# Altium PCB DS162-1.0-B甲烷传感器.PcbDoc
Units mm, origin at the board's own origin, x right, y up, seen from the top; angles counter-clockwise.
Board outline 41 x 64 mm, 2 copper layers (Top Layer, Bottom Layer); 31 components, 32 nets, 108 pads, 86 vias.
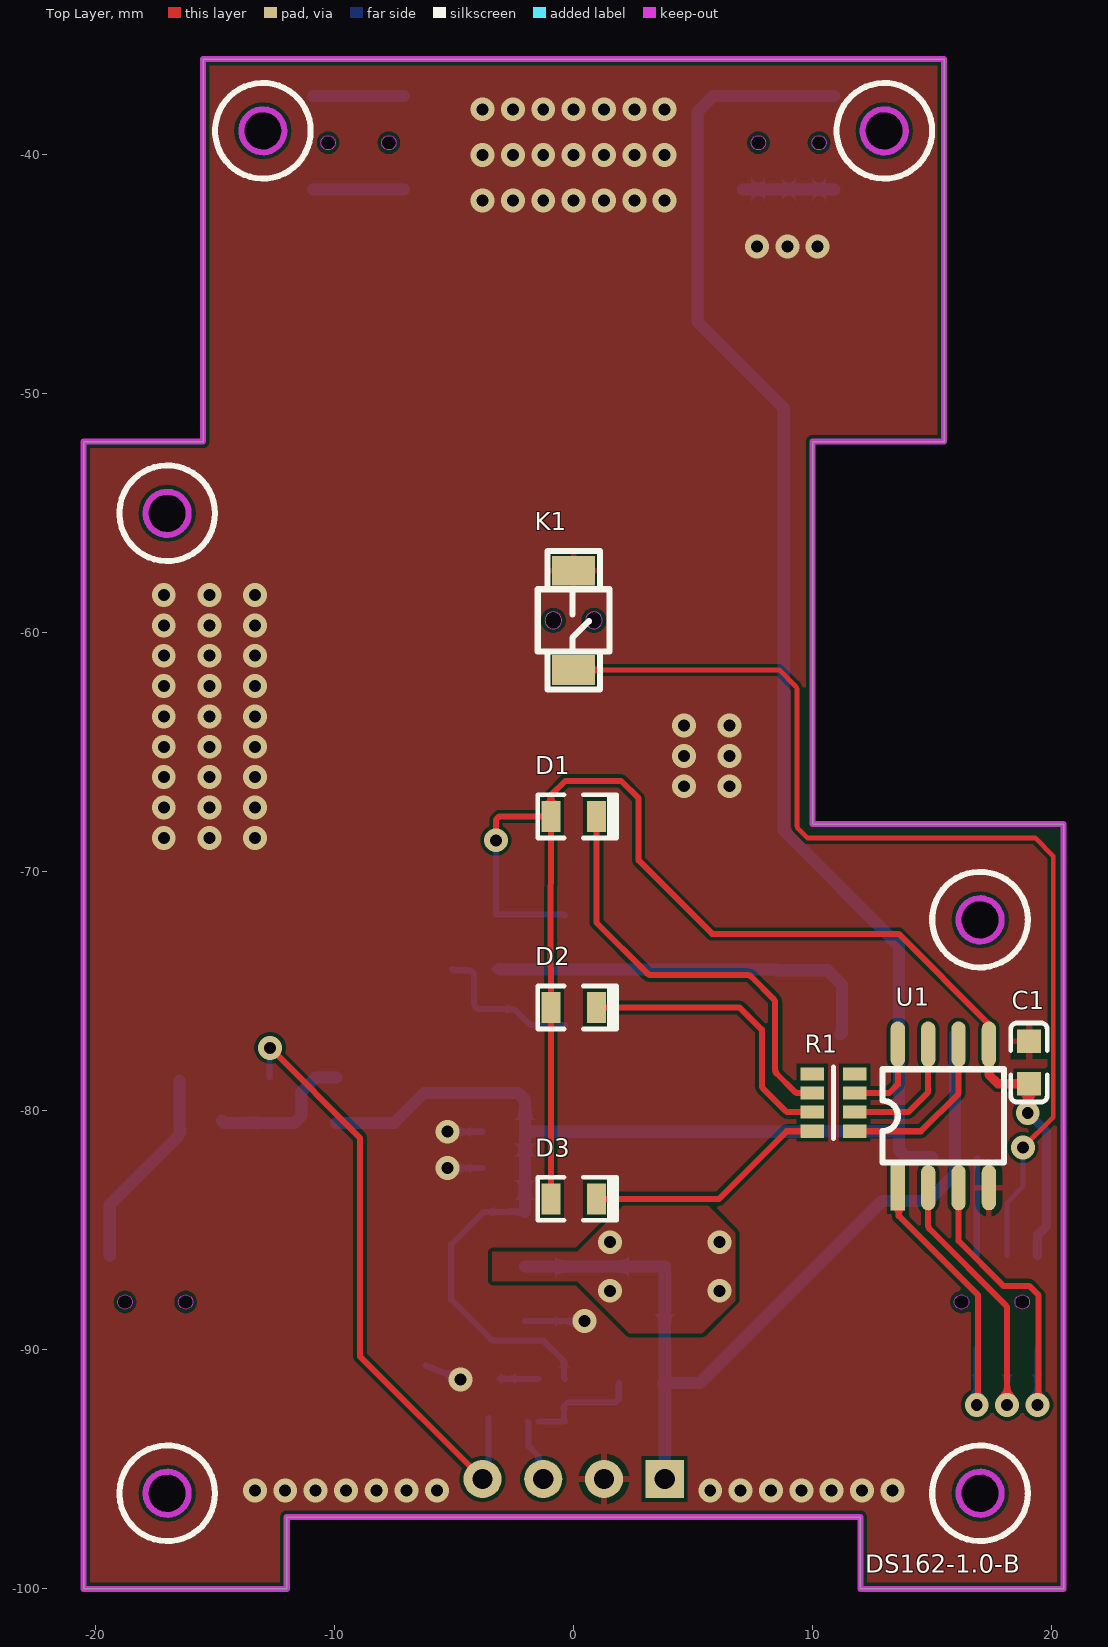
[diagram p0: Top Layer view]
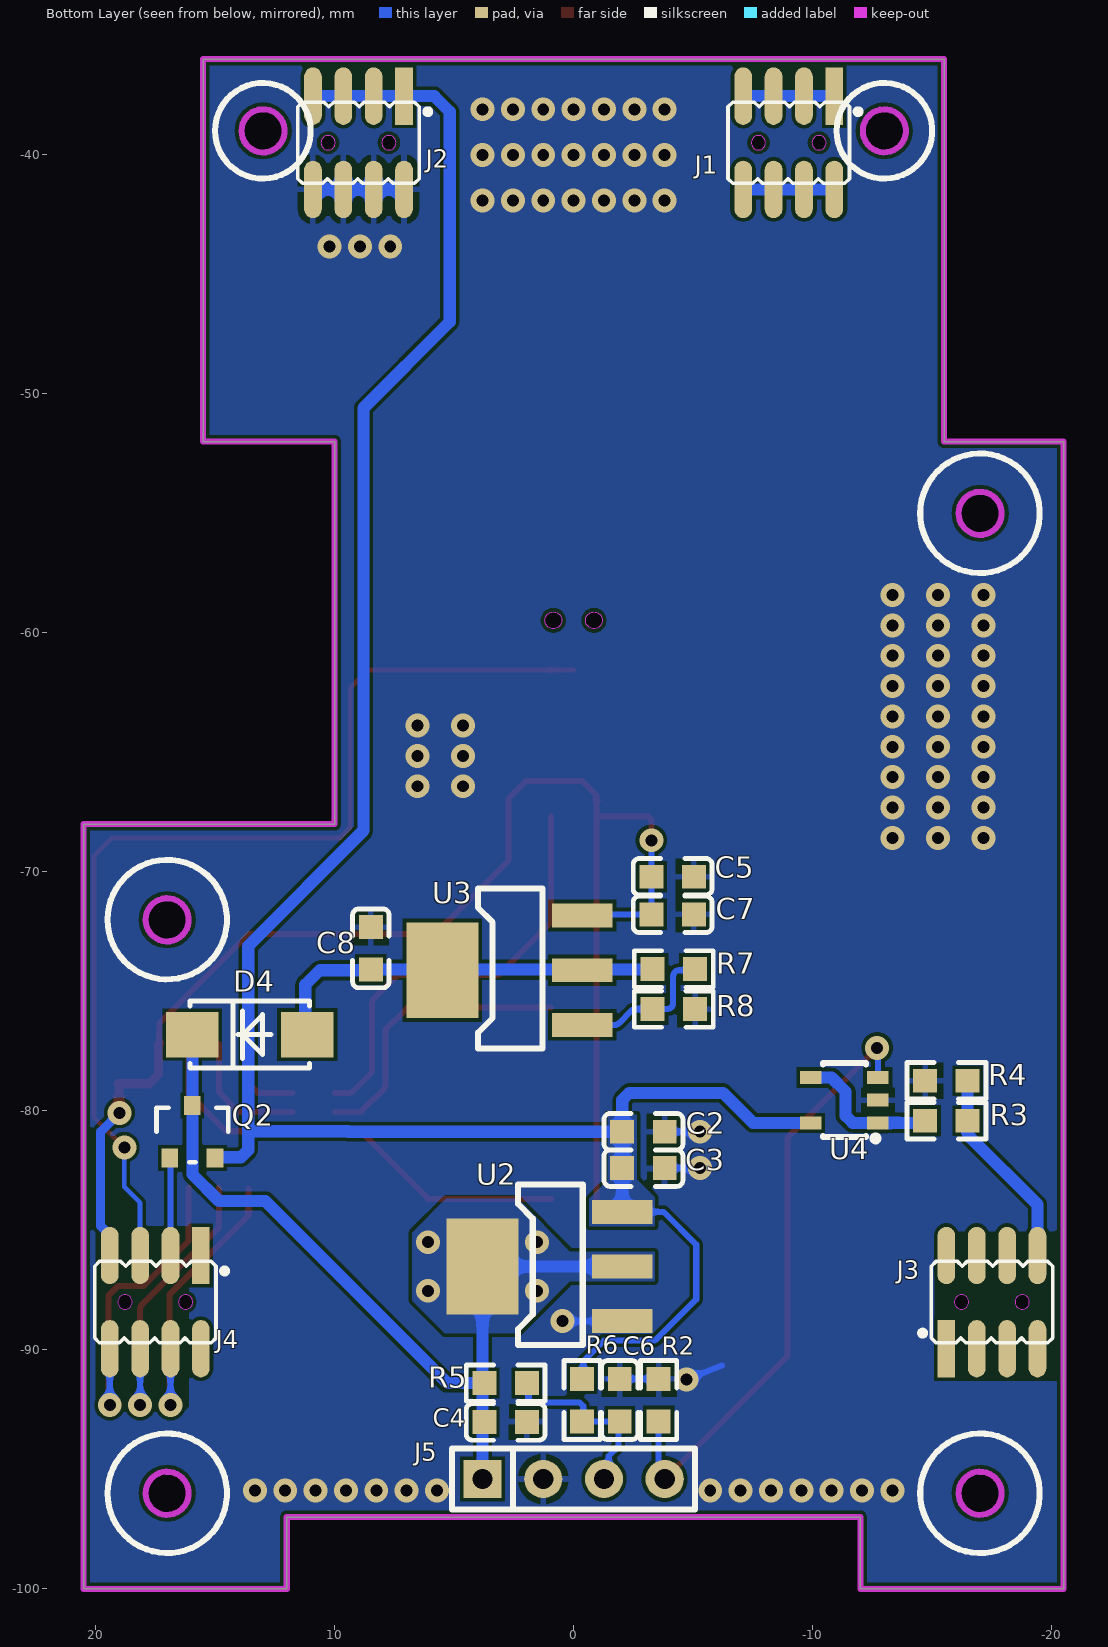
[diagram p1: Bottom Layer view, seen from below]

## Layer stack, top to bottom
Top Solder: solder mask 0.0102, Solder Resist, Dk 3.5
Top Layer: signal copper 0.0356
Dielectric 1: dielectric 0.32, FR-4, Dk 4.8
Bottom Layer: signal copper 0.0356
Bottom Solder: solder mask 0.0102, Solder Resist, Dk 3.5

## Board outline
-20.5,-100 -20.5,-52 -15.5,-52 -15.5,-36 15.5,-36 15.5,-52 10,-52 10,-68 20.5,-68 20.5,-100 12,-100 12,-97 -12,-97 -12,-100
cut-out: -17.9,-96 ccw(c-17,-96) -17,-96.9 ccw(c-17,-96) -16.1,-96 ccw(c-17,-96) -17,-95.1 ccw(c-17,-96)
cut-out: 16.1,-96 ccw(c17,-96) 17,-96.9 ccw(c17,-96) 17.9,-96 ccw(c17,-96) 17,-95.1 ccw(c17,-96)
cut-out: 16.1,-72 ccw(c17,-72) 17,-72.9 ccw(c17,-72) 17.9,-72 ccw(c17,-72) 17,-71.1 ccw(c17,-72)
cut-out: -17.9,-55 ccw(c-17,-55) -17,-55.9 ccw(c-17,-55) -16.1,-55 ccw(c-17,-55) -17,-54.1 ccw(c-17,-55)
cut-out: 12.1,-39 ccw(c13,-39) 13,-39.9 ccw(c13,-39) 13.9,-39 ccw(c13,-39) 13,-38.1 ccw(c13,-39)
cut-out: -13.9,-39 ccw(c-13,-39) -13,-39.9 ccw(c-13,-39) -12.1,-39 ccw(c-13,-39) -13,-38.1 ccw(c-13,-39)
cut-out: -17.9,-96 ccw(c-17,-96) -17,-96.9 ccw(c-17,-96) -16.1,-96 ccw(c-17,-96) -17,-95.1 ccw(c-17,-96)
cut-out: 16.1,-96 ccw(c17,-96) 17,-96.9 ccw(c17,-96) 17.9,-96 ccw(c17,-96) 17,-95.1 ccw(c17,-96)
cut-out: 16.1,-72 ccw(c17,-72) 17,-72.9 ccw(c17,-72) 17.9,-72 ccw(c17,-72) 17,-71.1 ccw(c17,-72)
cut-out: -17.9,-55 ccw(c-17,-55) -17,-55.9 ccw(c-17,-55) -16.1,-55 ccw(c-17,-55) -17,-54.1 ccw(c-17,-55)
cut-out: 12.1,-39 ccw(c13,-39) 13,-39.9 ccw(c13,-39) 13.9,-39 ccw(c13,-39) 13,-38.1 ccw(c13,-39)
cut-out: -13.9,-39 ccw(c-13,-39) -13,-39.9 ccw(c-13,-39) -12.1,-39 ccw(c-13,-39) -13,-38.1 ccw(c-13,-39)

## Design rules (kind name [scope] priority, off if disabled: settings)
Clearance [All] p1: gap=0.152 ignorepadtopadclearanceinfootprint=TRUE
PolygonConnect [All] p1: thpad.connectstyle=Relief thpad.reliefconductorwidth=0.254 thpad.reliefentries=4 thpad.polygonreliefangle="90 Angle" thpad.airgapwidth=0.254 smdpad.connectstyle=Relief smdpad.reliefconductorwidth=0.254 smdpad.reliefentries=4 smdpad.polygonreliefangle="90 Angle" smdpad.airgapwidth=0.254 via.connectstyle=Direct via.reliefconductorwidth=0.254 via.reliefentries=4 via.polygonreliefangle="90 Angle" via.airgapwidth=0.254
RoutingVias [All] p1: holewidth=0.406 width=0.813 viastyle="Through Hole" minholewidth=0.406 minwidth=0.813 maxholewidth=0.711 maxwidth=1.27
SolderMaskExpansion [All] p1: expansion=0.102 istentingtop=FALSE
Width [All] p1: maxlimit=0.508 minlimit=0.152 preferedwidth=0.254
30 further rules are at their usual default settings.

## Components (designator, comment, footprint, x,y, rotation, side; value= is the part's Value field where it differs from the comment)
C1 "SMDCAP00013" 0603CAP 19.05,-77.978 r270 top value=100nF
C2 "SMDCAP00015" 0603CAP -2.922,-80.874 r0 bottom value=1uF
C3 "SMDCAP00013" 0603CAP -2.922,-82.398 r0 bottom value=100nF
C4 "SMDCAP00015" 0603CAP 2.845,-93.015 r0 bottom value=1uF
C5 "SMDCAP00015" 0603CAP -4.141,-70.206 r0 bottom value=1uF
C6 "SMDCAP00013" 0603CAP -1.93,-92.1 r270 bottom value=100nF
C7 "SMDCAP00013" 0603CAP -4.141,-71.78 r0 bottom value=100nF
C8 "SMDCAP00015" 0603CAP 8.484,-73.203 r270 bottom value=1uF
D1 "SMDLED00010" LED_0805 0,-67.68 r0 top value=BLUE
D2 "SMDLED00003" LED_0805 0,-75.68 r0 top value=RED
D3 "Chip 翠绿LED 0805" LED_0805 0,-83.68 r0 top value=GREEN
D4 "SMDDIODE06003" SMA/DO-214AC 13.551,-76.81 r0 bottom value=SS12
J1 "X1321WVS-2x04J-C40D53" X1321WVS-2X04J-C40D53 -9,-39.5 r0 bottom locked value=2*4P
J2 "X1321WVS-2x04J-C40D53" X1321WVS-2X04J-C40D53 9,-39.5 r0 bottom locked value=2*4P
J3 "X1321WVS-2x04J-C40D53" X1321WVS-2X04J-C40D53 -17.5,-88 r180 bottom locked value=2*4P
J4 "X1321WVS-2x04J-C40D53" X1321WVS-2X04J-C40D53 17.5,-88 r0 bottom locked value=2*4P
J5 "SL000000042" SIP4 0,-95.402 r180 bottom value=MP-3B
K1 "TS-1185-B-A-A-A" KEY_TS-1185-x-A-A-A 0,-59.48 r270 top
Q2 "SMDPMOS00001" SOT23 15.951,-80.874 r180 bottom value=IRLML6402TRPBF
R1 "SMDRES05003" 0603RES_Pack4 10.871,-79.654 r180 top value=510R
R2 "SMDRES00047" 0603RES -3.556,-92.1 r270 bottom value=4.7K
R3 "SMDRES00056" 0603RES -15.596,-80.416 r0 bottom value=10K
R4 "SMDRES00056" 0603RES -15.596,-78.74 r0 bottom value=10K
R5 "Chip 0R 1/16W ±1％ 0603" 0603RES 2.845,-91.389 r0 bottom value=0R
R6 "Chip 0R 1/16W ±1％ 0603" 0603RES -0.356,-92.1 r270 bottom value=0R
R7 "SMDRES00027" 0603RES -4.192,-74.066 r0 bottom value=470R
R8 "SMDRES00038" 0603RES -4.192,-75.743 r180 bottom value=1.3K
U1 "SMDIC000018" SO-8 15.469,-80.21 r90 top value=ULN2001
U2 "SMDIC000020" SOT223 3.81,-86.512 r180 bottom value=AMS1117-2.5V
U3 "SMDIC000020" SOT223 5.486,-74.117 r180 bottom value=AMS1117-ADJ
U4 "AD8605" SOT23-5 -11.328,-79.553 r90 bottom

## Footprints (in the part's own frame and the unit in brackets; to place one, negate y for a bottom-side part, rotate by r counter-clockwise, add the part's x,y. Pads: shape width x height; smd on the part's side, far side on the other; paste and mask are expansions set on the pad)
0603CAP [mm]
  rect 1x1 smd: 1(-0.889,0) 2(0.89,0)
  silkscreen extent -1.65,-0.76 1.65,0.76, body extent -0.8,-0.4 0.8,0.4, height 0.3
0603RES [mm]
  rect 1x1 smd: 1(-0.889,0) 2(0.889,0)
  silkscreen extent -1.65,-0.76 1.65,0.76, body extent -0.8,-0.41 0.8,0.41, height 0.51
0603RES_Pack4 [mm]
  rect 1x0.55 smd mask+0.05: 1(-0.889,1.2) 2(-0.889,0.4) 3(-0.889,-0.4) 4(-0.889,-1.2) 5(0.889,-1.2) 6(0.889,-0.4) 7(0.889,0.4) 8(0.889,1.2)
  silkscreen extent 0,-1.5 0,1.5, body extent -0.8,-1.6 0.8,1.6, height 0.5
KEY_TS-1185-x-A-A-A [mm]
  rect 1.25x1.8 smd: 1(-2.075,0) 2(2.075,0)
  Keep-Out Layer board cut-out: 0.35,-0.85 0.323,-0.716 0.247,-0.603 0.134,-0.527 0,-0.5 0,-0.5 -0.134,-0.527 -0.247,-0.603 -0.323,-0.716 -0.35,-0.85 -0.35,-0.85 -0.323,-0.984 -0.247,-1.097 -0.134,-1.173 0,-1.2 0,-1.2 0.134,-1.173 0.247,-1.097 0.323,-0.984 0.35,-0.85
  Keep-Out Layer board cut-out: -0.35,0.85 -0.323,0.716 -0.247,0.603 -0.134,0.527 0,0.5 0,0.5 0.134,0.527 0.247,0.603 0.323,0.716 0.35,0.85 0.35,0.85 0.323,0.984 0.247,1.097 0.134,1.173 0,1.2 0,1.2 -0.134,1.173 -0.247,1.097 -0.323,0.984 -0.35,0.85
  silkscreen extent -2.9,-1.5 2.9,1.5, body extent -2.5,-1.5 2.5,1.5, height 2
LED_0805 [mm]
  rect 0.8x1.3 smd: 1(-0.95,0) 2(0.95,0)
  silkscreen extent -1.5,-0.9 1.8,0.9, body extent -1,-0.45 1.06,0.45, height 0.85
SIP4 [mm]
  rect 1.6x1.6 hole 0.843: 1(-3.81,0)
  round 1.6 hole 0.843: 2(-1.27,0) 3(1.27,0) 4(3.81,0)
  silkscreen extent -5.08,-1.27 5.08,1.27, body extent -5.08,-1.27 5.08,1.27, height 8.64
SMA/DO-214AC [mm]
  rect 2.2x1.9 smd: 1(-2.4,0) 2(2.4,0)
  silkscreen extent -2.5,-1.4 2.5,1.4, body extent -2.74,-1.4 2.74,1.4, height 2.28
SO-8 [mm]
  rect 1.9x0.6 smd: 1(-3,1.905)
  oval 1.9x0.6 smd: 2(-3,0.635) 3(-3,-0.635) 4(-3,-1.905) 5(3,-1.905) 6(3,-0.635) 7(3,0.635) 8(3,1.905)
  silkscreen extent -1.95,-2.54 1.95,2.54, body extent -3.07,-2.44 3.07,2.44, height 1.77
SOT23 [mm]
  rect 0.7x0.8 smd: 1(-0.95,-1.1) 2(0.95,-1.1) 3(0,1.1)
  silkscreen extent -1.5,-1.27 1.5,1, body extent -1.46,-1.17 1.46,1.17, height 1
SOT23-5 [mm] "SOT-23/SC-74A; 5 Leads; Body 3.1 x 3 mm, inc. leads (LxW max)"
  rect 0.55x0.9 smd: 1(-0.95,-1.4) 2(0,-1.4) 3(0.95,-1.4) 4(0.95,1.4) 5(-0.95,1.4)
  silkscreen extent -1.7,-1.4 1.55,0.9, body extent -1.45,-1.4 1.45,1.4, height 1.45
SOT223 [mm]
  rect 2.54x1 smd: 1(5.842,-2.286) 2(5.842,0) 3(5.842,2.286)
  rect 3x4 smd: 2(0,0)
  silkscreen extent 1.48,-3.28 4.19,3.42, body extent -0.4,-3.25 6.6,3.25, height 1.65
X1321WVS-2X04J-C40D53 [mm]
  rect 0.74x2.4 smd: 1(-1.905,-1.95)
  oval 0.74x2.4 smd: 2(-1.905,1.95) 3(-0.635,-1.95) 4(-0.635,1.95) 5(0.635,-1.95) 6(0.635,1.95) 7(1.905,-1.95) 8(1.905,1.95)
  Keep-Out Layer board cut-out: -1.57,0 -1.547,-0.115 -1.482,-0.212 -1.385,-0.277 -1.27,-0.3 -1.27,-0.3 -1.155,-0.277 -1.058,-0.212 -0.993,-0.115 -0.97,0 -0.97,0 -0.993,0.115 -1.058,0.212 -1.155,0.277 -1.27,0.3 -1.27,0.3 -1.385,0.277 -1.482,0.212 -1.547,0.115 -1.57,0
  Keep-Out Layer board cut-out: 1.57,0 1.547,0.115 1.482,0.212 1.385,0.277 1.27,0.3 1.27,0.3 1.155,0.277 1.058,0.212 0.993,0.115 0.97,0 0.97,0 0.993,-0.115 1.058,-0.212 1.155,-0.277 1.27,-0.3 1.27,-0.3 1.385,-0.277 1.482,-0.212 1.547,-0.115 1.57,0
  silkscreen extent -3,-1.7 2.54,1.7, body extent -2.54,-2.6 2.54,2.6, height 5.5

## Part data
C1 C3 C6 C7: library part "MLCC 100nF 50V ±10％ 0603", "贴片电容"
C2 C4 C5 C8: library part "MLCC 1uF 50V ±10％ 0603", "贴片电容"
D1: library part "Chip 蓝色LED 0805", "贴片LED"
D2: library part "Chip 红色LED 0805", "贴片LED"
D3: "贴片LED"
D4: library part "SS12 SMA/DO-214AC（1N5817）", "贴片肖特基二极管"
J1 J2 J3 J4: "双排针2x4P 立贴 1.27mm"
J5: library part "DIP4 单排直针 间距2.54mm 针长11mm 铜"
K1: "轻触开关"
Q2: library part "IRLML6402TRPBF SOT-23 IR", "贴片P-MOS管"
R1: library part "Chip R*4 510R 1/16W ±5％ 0603", "贴片排阻"
R2: library part "Chip 4.7K 1/16W ±1％ 0603", "贴片电阻"
R3 R4: library part "Chip 10K 1/16W ±1％ 0603", "贴片电阻"
R5 R6: "贴片电阻"
R7: library part "Chip 470R 1/16W ±1％ 0603", "贴片电阻"
R8: library part "Chip 1.3K 1/16W ±1％ 0603", "贴片电阻"
U1: library part "ULN2001 SOP-8", "电机驱动芯片"
U2 U3: library part "AMS1117-3.3V SOT-223", "稳压芯片"
U4: library part "AD8605 SOT23-5", "运放芯片"

## Via types
v1: diameter 1, hole 0.5, Top Layer to Bottom Layer, tented both sides, 86 vias

## Nets (pads, with @x,y where several pads share a name; then routed paths per layer and width w, separated by ;. In a path a pad name is that pad's centre, name@x,y a point inside that pad or via, vN(x,y) a via of type N, cw(c..) or ccw(c..) an arc to the next point about the centre after c; other vN are vias at no path point)
ADC0: J3.8 R3.1 R4.1 | length 8.5
  Bottom Layer w0.508: J3.8 -19.405,-83.922 -16.608,-81.125 ccw(c-16.967,-80.765) -16.459,-80.765 -16.485,-80.74 R3.1 R4.1
ADC1: J4.2
DAC_OUT: J3.6
Dis_blue_EN: J4.4 U1.1 | length 12.8
  Top Layer w0.254: U1.1@13.603,-83.25 13.603,-84.393 16.911,-87.701 16.911,-92.257 v1(16.865,-92.303)
  Bottom Layer w0.254: v1(16.865,-92.303) J4.4
Dis_green_EN: J4.8 U1.3 | length 13.5
  Top Layer w0.254: U1.3 16.104,-85.446 17.977,-87.319 19.052,-87.319 19.451,-87.718 19.451,-92.257 v1(19.405,-92.303)
  Bottom Layer w0.254: v1(19.405,-92.303) J4.8
Dis_red_EN: J4.6 U1.2 | length 12.8
  Top Layer w0.254: U1.2 14.834,-84.782 ccw(c15.088,-84.782) 14.908,-84.961 18.061,-88.114 cw(c17.881,-88.293) 18.135,-88.293 v1(18.135,-92.303)
  Bottom Layer w0.254: v1(18.135,-92.303) J4.6
GND: C1.1 C2.1 C3.1 C4.1 C5.1 C6.1 C7.1 C8.1 J2.2 J2.4 J2.6 J2.8 J5.2 K1.1 R2.1 R4.2 R8.2 U1.4 U2.1 U4.2 | length 12.5
  Bottom Layer w0.254: -6.198,-90.653 v1(-4.724,-91.237) ; v1(-5.283,-82.398) C3.1 ; v1(-5.283,-80.874) C2.1 ; R2.1@-3.099,-91.211 C6.1@-1.473,-91.211 ; U2.1 v1(0.457,-88.798)
  Bottom Layer w0.508: J2.2 J2.4 J2.6 J2.8
  other v1: -13.335,-95.885 -12.065,-95.885 -10.795,-95.885 -9.525,-95.885 -8.255,-95.885 -6.985,-95.885 -5.715,-95.885 5.715,-95.885 6.985,-95.885 8.255,-95.885 9.525,-95.885 10.795,-95.885 12.065,-95.885 13.335,-95.885 -17.145,-68.58 -15.24,-68.58 -13.335,-68.58 -17.145,-67.31 -15.24,-67.31 -13.335,-67.31 4.623,-66.421 6.528,-66.421 -17.145,-66.04 -15.24,-66.04 -13.335,-66.04 4.623,-65.151 6.528,-65.151 -17.145,-64.77 -15.24,-64.77 -13.335,-64.77 4.623,-63.881 6.528,-63.881 -17.145,-63.5 -15.24,-63.5 -13.335,-63.5 -17.145,-62.23 -15.24,-62.23 -13.335,-62.23 -17.145,-60.96 -15.24,-60.96 -13.335,-60.96 -17.145,-59.69 -15.24,-59.69 -13.335,-59.69 -17.145,-58.42 -15.24,-58.42 -13.335,-58.42 7.671,-43.84 8.941,-43.84 10.211,-43.84 -3.81,-41.91 -2.54,-41.91 -1.27,-41.91 0,-41.91 1.27,-41.91 2.54,-41.91 3.81,-41.91 -3.81,-40.005 -2.54,-40.005 -1.27,-40.005 0,-40.005 1.27,-40.005 2.54,-40.005 3.81,-40.005 -3.81,-38.1 -2.54,-38.1 -1.27,-38.1 0,-38.1 1.27,-38.1 2.54,-38.1 3.81,-38.1
I2C1_SCL: J4.1
I2C1_SDA: J4.3 Q2.1 | length 4.1
  Bottom Layer w0.254: J4.3 16.865,-82.01 Q2.1
KEY_HOME: J4.5 K1.2 | length 44.2
  Top Layer w0.2: K1.2 8.596,-61.555 9.289,-62.248 cw(c9.147,-62.389) 9.347,-62.389 9.347,-68.065 ccw(c9.547,-68.065) 9.406,-68.207 9.779,-68.58 19.304,-68.58 20.066,-69.342 20.066,-80.264 v1(18.796,-81.534)
  Bottom Layer w0.2: J4.5 18.135,-83.846 18.796,-83.185 v1(18.796,-81.534)
LED_blue: D1.2 R1.6 | length 18.1
  Top Layer w0.254: D1.2 0.95,-72.121 3.075,-74.246 ccw(c3.255,-74.066) 3.255,-74.32 7.261,-74.32 cw(c7.261,-74.574) 7.441,-74.395 8.358,-75.313 cw(c8.179,-75.492) 8.433,-75.492 8.433,-78.279 ccw(c8.687,-78.279) 8.507,-78.459 9.229,-79.181 ccw(c9.408,-79) 9.407,-79.254 R1.6
LED_green: D3.2 R1.8 | length 10.2
  Top Layer w0.254: D3.2 6.087,-83.68 8.913,-80.854 R1.8
LED_red: D2.2 R1.7 | length 12.2
  Top Layer w0.254: D2.2 6.948,-75.68 7.874,-76.606 7.874,-78.914 ccw(c8.128,-78.914) 7.948,-79.094 8.835,-79.981 ccw(c9.014,-79.8) 9.013,-80.054 R1.7
NetC6_2: C6.2 J5.3 R5.1 R6.2 | length 7.5
  Bottom Layer w0.254: C6.2 -1.88,-93.041 -1.88,-94.031 -1.47,-94.44 -1.47,-95.202 J5.3 ; C6.2@-1.473,-92.99 R6.2 ; R6.2 -0.406,-92.939 -0.406,-92.354 -0.254,-92.202 1.74,-92.202 1.889,-92.053 1.889,-91.406 R5.1@1.905,-91.389
NetR1_1: R1.1 U1.6 | length 7.1
  Top Layer w0.254: R1.1 14.529,-80.854 16.104,-79.28 U1.6
NetR1_2: R1.2 U1.7 | length 5.4
  Top Layer w0.254: R1.2 14.002,-80.054 14.834,-79.223 U1.7
NetR1_3: R1.3 U1.8 | length 3.6
  Top Layer w0.254: R1.3 13.202,-79.254 13.564,-78.892 U1.8
NetR3_2: R3.2 U4.1 U4.4 | length 6.2
  Bottom Layer w0.508: R3.2 -14.62,-80.503 U4.1 -11.677,-80.503 -11.379,-80.205 -11.379,-79.197 -10.785,-78.603 U4.4
NetR7_1: R7.1 R8.1 U3.1 | length 6.4
  Bottom Layer w0.254: R7.1 -5.03,-74.117 -4.42,-74.117 cw(c-4.42,-74.371) -4.166,-74.37 -4.166,-75.49 ccw(c-3.912,-75.489) -3.913,-75.743 R8.1 -2.594,-75.743 cw(c-2.594,-75.997) -2.416,-75.816 -1.903,-76.329 ccw(c-1.724,-76.149) -1.725,-76.403 U3.1
Signal: J5.4 R2.2 U4.3 | length 25.6
  Top Layer w0.254: v1(-12.7,-77.368) -8.941,-81.128 -8.941,-90.272 J5.4
  Bottom Layer w0.254: U4.3 -12.728,-77.397 v1(-12.7,-77.368) ; J5.4 -3.81,-95.365 -3.63,-95.185 ccw(c-3.81,-95.006) -3.556,-95.006 R2.2@-3.556,-92.853
SPI2_CS: J3.4
SPI2_MISO: J3.1
SPI2_MOSI: J3.3
SPI2_SCK: J3.2
USART2_RXD: J3.5
USART2_TXD: J3.7
VBUS: J1.2 J1.4 J1.6 J1.8 | length 3.8
  Bottom Layer w0.508: J1.2 J1.4 J1.6 J1.8
VCC_1V7: C8.2 D4.1 R7.2 U3.2 | length 16.9
  Bottom Layer w0.254: R7.2@-3.302,-74.065 R7.2 R7.2@-3.099,-74.066
  Bottom Layer w0.508: R7.2@-3.099,-74.066 -3.072,-74.093 C8.2 ; C8.2@8.484,-74.117 10.617,-74.117 11.227,-74.727 11.227,-76.734 D4.1
VCC_2V5: C4.2 D4.2 J5.1 Q2.3 R5.2 U2.2 | length 36.4
  Bottom Layer w0.508: U2.2@-2.032,-86.512 3.81,-86.512 R5.2@3.81,-91.389 ; R5.2 R5.2@3.81,-91.389 ; J5.1 R5.2@3.81,-91.389 ; D4.2 Q2.3 15.951,-82.652 14.834,-83.769 12.903,-83.769 5.283,-91.389 R5.2@3.81,-91.389
  other v1: 1.524,-87.528 6.096,-87.528 1.524,-85.496 6.096,-85.496
VCC_3V3_MCU: C1.2 C5.2 C7.2 D1.1 D2.1 D3.1 J4.7 U1.5 U3.3 | length 62.1
  Top Layer w0.254: v1(-3.251,-68.682) -3.251,-67.829 -3.102,-67.68 D1.1 ; -0.965,-72.848 -0.953,-75.157 D2.1 D3.1 ; -0.965,-72.847 -0.952,-68.203 D1.1 ; U1.5@17.332,-77.168 17.332,-76.336 13.594,-72.598 5.796,-72.598 2.718,-69.52 2.718,-66.929 1.981,-66.192 -0.34,-66.192 -0.95,-66.802 D1.1
  Top Layer w0.381: U1.5@17.332,-77.168 U1.5 17.374,-78.486 17.756,-78.868 C1.2 19.025,-78.893 19.025,-80.061 v1(18.999,-80.086)
  Bottom Layer w0.254: v1(-3.251,-68.682) C5.2 C7.2 -0.406,-71.78 U3.3
  Bottom Layer w0.381: v1(18.999,-80.086) 19.787,-80.874 19.787,-84.817 19.405,-85.199 J4.7
VCC_5V: C2.2 C3.2 J2.1 J2.3 J2.5 J2.7 Q2.2 R6.1 U2.3 U4.5 | length 95.8
  Bottom Layer w0.254: U2.3 -3.759,-84.226 -5.131,-85.598 -5.131,-87.884 -3.478,-89.537 ccw(c-3.298,-89.357) -3.298,-89.611 -1.27,-89.611 -0.402,-90.479 -0.402,-91.165 R6.1
  Bottom Layer w0.508: U4.5 -7.503,-80.503 -6.248,-79.248 -2.33,-79.248 -2.032,-79.546 C2.2 ; U2.3 C3.2 C2.2 ; J2.7 J2.5 J2.3 J2.1 5.833,-37.55 5.182,-38.202 5.182,-46.99 8.788,-50.597 8.788,-68.275 13.614,-73.101 13.614,-80.854 ; Q2.2 14.968,-81.94 13.912,-81.94 13.614,-81.643 13.614,-80.854 ; C2.2 9.428,-80.874 9.448,-80.854 13.614,-80.854
VSS: J1.1 J1.3 J1.5 J1.7 | length 3.8
  Bottom Layer w0.508: J1.1 J1.3 J1.5 J1.7
pads on no net: R1.4 R1.5

## Polygon pours and split planes (outlines as drawn)
GND on Bottom Layer "GND_L02_P006" (solid, remove dead copper, pour order 6): -20.5,-100 -20.5,-52 -15.5,-52 -15.5,-36 15.5,-36 15.5,-52 10,-52 10,-68 20.5,-68 20.5,-100 12,-100 12,-97 -12,-97 -12,-100
VCC_2V5 on Bottom Layer "VCC_2V5_L02_P004" (solid, remove dead copper, pour order 4): -3.404,-85.903 0.152,-85.903 2.325,-83.68 5.346,-83.68 6.756,-85.09 6.756,-87.935 5.385,-89.306 2.337,-89.306 0.152,-87.122 -3.404,-87.122
VCC_5V on Bottom Layer "VCC_5V_L02_P005" (solid, remove dead copper, pour order 5): -0.66,-84.836 -0.66,-83.668 -1.422,-82.906 -1.422,-80.162 -2.642,-80.162 -2.642,-82.855 -3.404,-83.617 -3.404,-83.718 -3.404,-84.836 -0.711,-84.836
GND on Top Layer "GND_L01_P008" (solid, remove dead copper, pour order 8): -20.5,-100 -20.5,-52 -15.5,-52 -15.5,-36 15.5,-36 15.5,-52 10,-52 10,-68 20.5,-68 20.5,-100 12,-100 12,-97 -12,-97 -12,-100
VCC_2V5 on Top Layer "VCC_2V5_L01_P007" (solid, remove dead copper, pour order 7): -3.404,-85.903 0.152,-85.903 2.083,-83.972 5.639,-83.972 6.756,-85.09 6.756,-87.935 5.385,-89.306 2.337,-89.306 0.152,-87.122 -3.404,-87.122

## Keep-outs
Keep-Out Layer:
  circle w0.254: c-13,-39 r0.9
  circle w0.254: c12.992,-39.002 r0.903
  circle w0.254: c17.005,-72.009 r0.903
  circle w0.254: c-17.005,-55.004 r0.903
  circle w0.254: c17.005,-95.999 r0.903
  circle w0.254: c-17.005,-95.999 r0.903
  lines w0.254: -20.5,-100 -12,-100 -12,-97 12,-97 12,-100 20.5,-100 20.5,-68 10,-68 10,-52 15.5,-52 15.5,-36 -15.5,-36 -15.5,-52 -20.5,-52 -20.5,-100

## Other copper
Bottom Layer:
  pour cut-out: 16.087,-85.302 16.087,-84.811 16.744,-84.811 20.015,-84.811 20.015,-92.604 16.306,-92.604 16.087,-92.385
  pour cut-out: -15.103,-85.016 -15.126,-85.039 -20.117,-85.039 -20.117,-91.262 -20.077,-91.302 -15.073,-91.302

## Silkscreen, mask and mechanical layers (free items; w line width, h text height)
Top Overlay:
  circle w0.254: c-17,-96 r2
  circle w0.254: c17,-96 r2
  circle w0.254: c17,-72 r2
  circle w0.254: c-17,-55 r2
  circle w0.254: c-13,-39 r2
  circle w0.254: c13,-39 r2
  text "DS162-1.0-B" at 12.192,-99.568 h1.27
Bottom Overlay:
  circle w0.254: c-17,-96 r2.5
  circle w0.254: c17,-96 r2.5
  circle w0.254: c17,-72 r2.5
  circle w0.254: c-17,-55 r2.5
  circle w0.254: c-13,-39 r2
  circle w0.254: c13,-39 r2
Bottom Solder:
  region: -3.404,-87.122 0.152,-87.122 2.337,-89.306 5.385,-89.306 6.756,-87.935 6.756,-85.09 5.346,-83.68 2.325,-83.68 0.152,-85.903 -3.404,-85.903
Mechanical 1:
  circle w0.254: c17,-72 r0.9
  circle w0.254: c-13,-39 r0.9
  circle w0.254: c13,-39 r0.9
  circle w0.254: c-17,-55 r0.9
  circle w0.254: c17,-96 r0.9
  circle w0.254: c-17,-96 r0.9
  lines w0.254: -20.5,-100 -12,-100 -12,-97 12,-97 12,-100 20.5,-100 20.5,-68 10,-68 10,-52 15.5,-52 15.5,-36 -15.5,-36 -15.5,-52 -20.5,-52 -20.5,-100
Mechanical 15:
  lines w0.15: -4.485,-36 -4.485,-44.41 4.485,-44.41 4.485,-36
  lines w0.508: -16,-51 16,-51